# EAGLE board mux_geurts_3 (EAGLE 6.4)
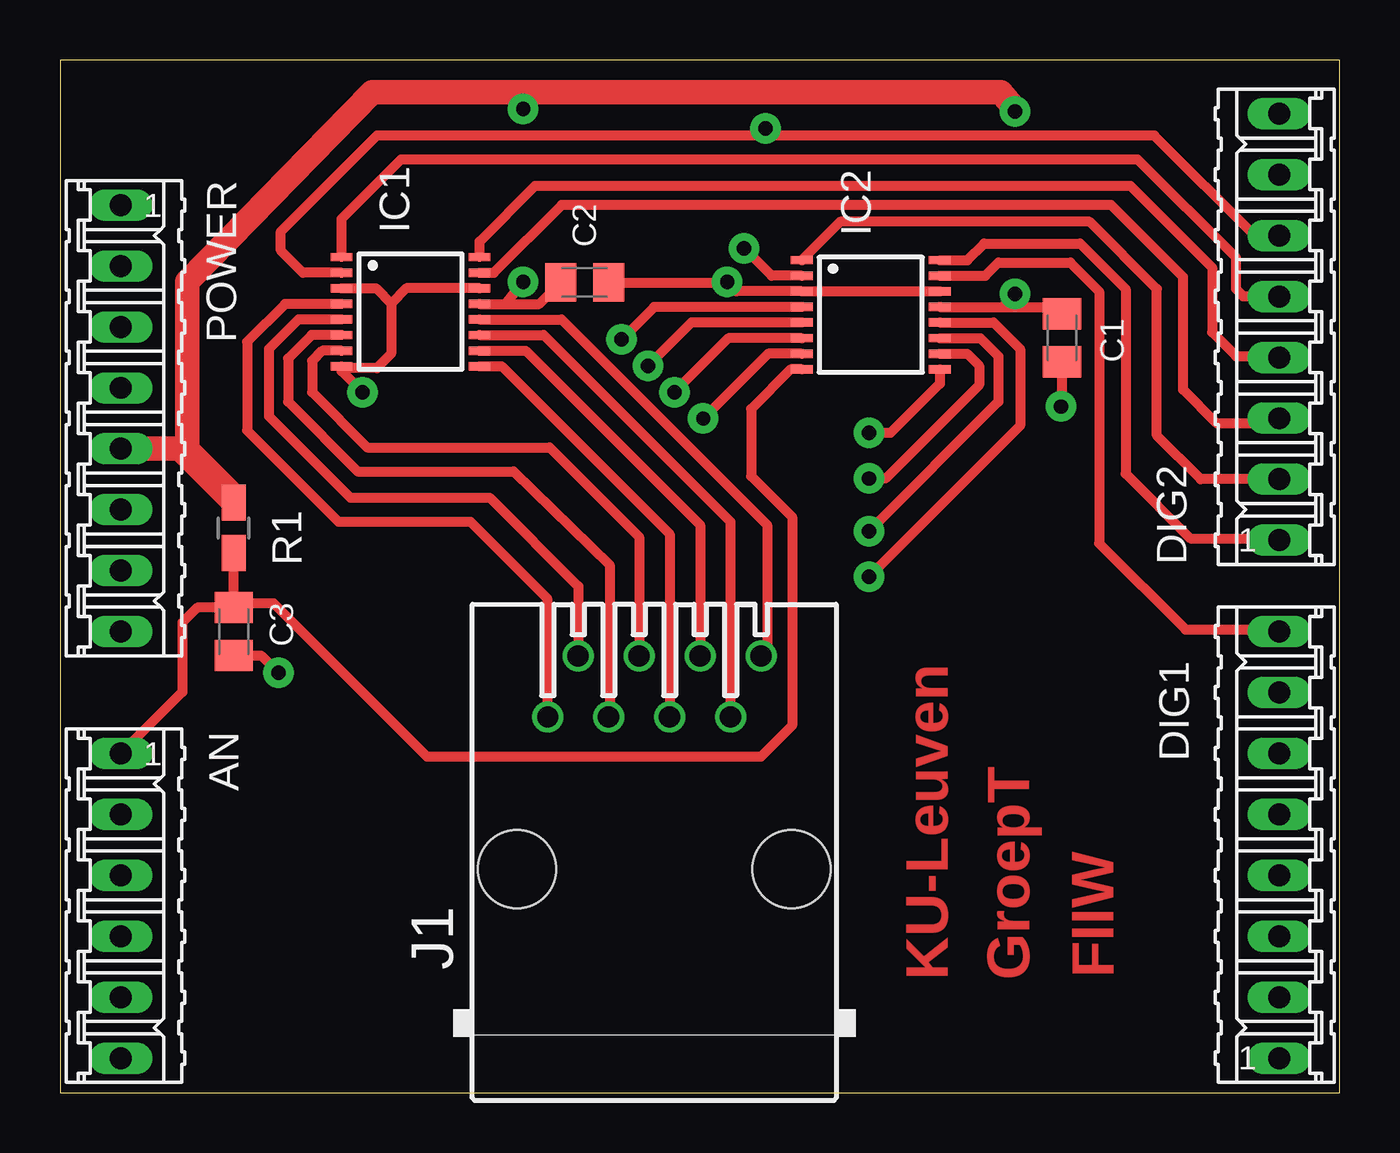
[diagram p0: board, top side]
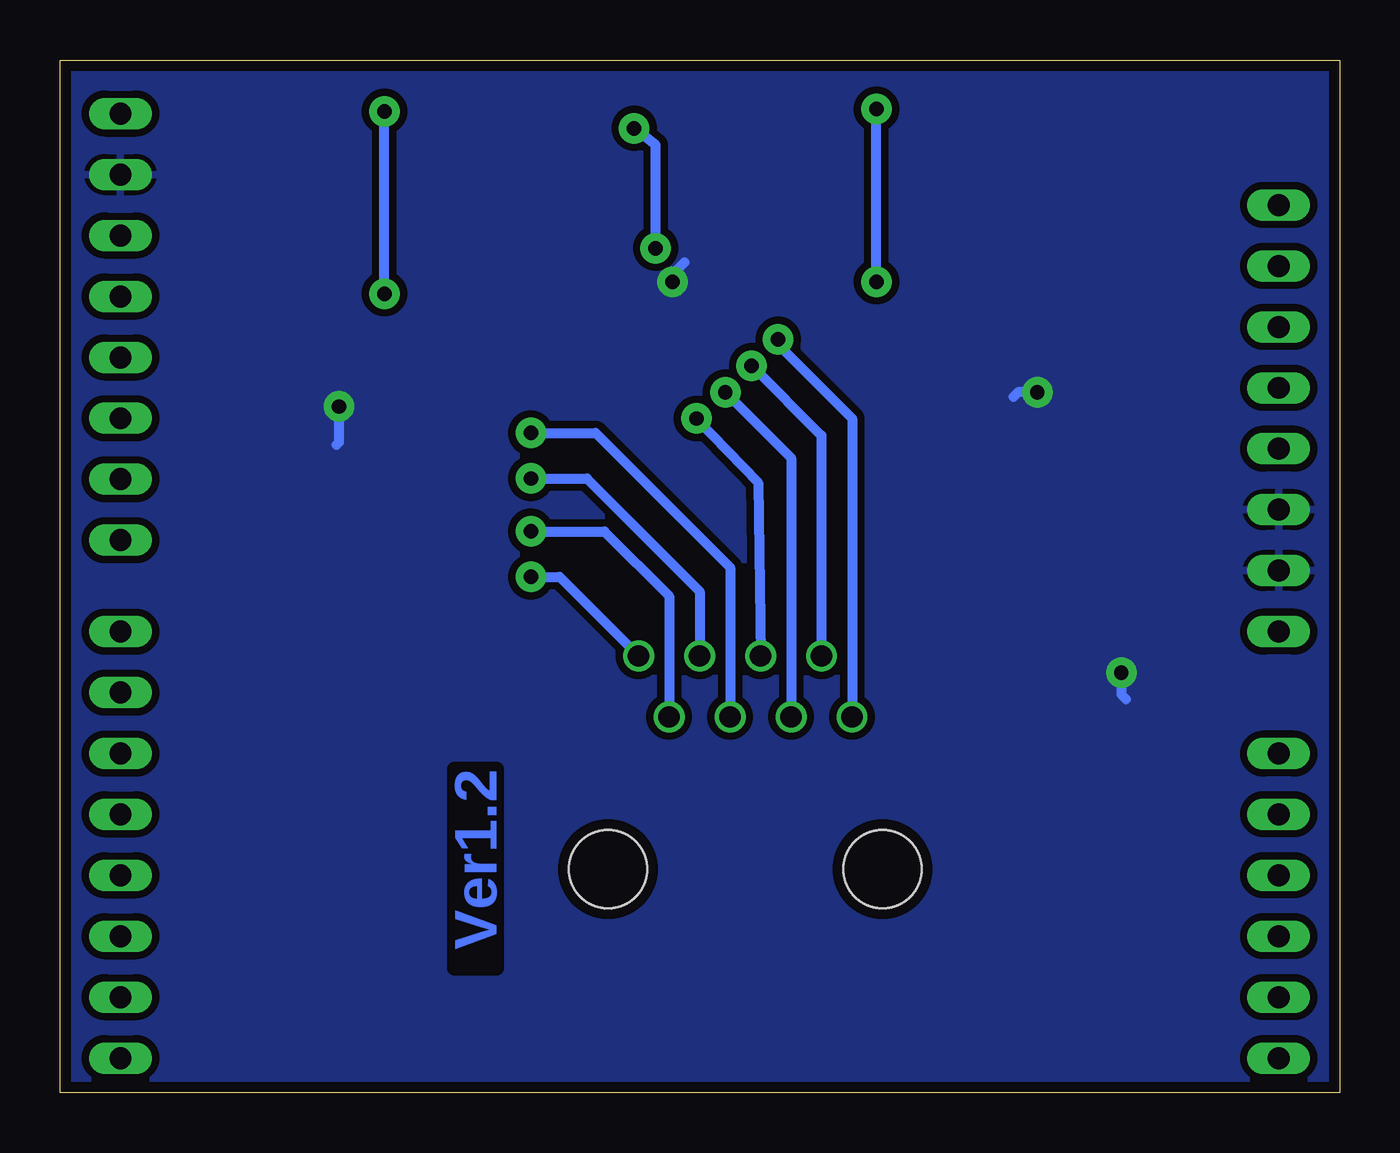
[diagram p1: board, bottom side, seen from below]

Size 53.32 x 43.05 mm. Coordinates in mm from the lower left corner, seen from the top.
Outline: 0,0 53.32,0 53.32,43.05 0,43.05 0,0
Copper layers (1*16): Top 0.018mm / dielectric 1.55mm / Bottom 0.018mm
Design rules "eC-PCB_proto-2-layer": minimum track width 0.15mm, minimum drill 0.25mm, track to track 0.15mm, track to pad 0.15mm, pad to pad 0.15mm, via to via 0.15mm, smd to smd 0.15mm, copper to edge 0.45mm, drill to drill 0.3mm, minimum pad ring 0.2mm, minimum via ring 0.2mm, stop-mask expansion 0.1mm, vias tented up to drill 0mil, thermal gap 0.2mm

## Footprints (pad centres in the part's own frame; a part is rotated, then mirrored left to right if it is on the bottom)
06P = drill 0.914 long: 1 -6.35,0; 2 -3.81,0; 3 -1.27,0; 4 1.27,0; 5 3.81,0; 6 6.35,0
C0805K = smd 1.3 x 1.6: 1 -1,0; 2 1,0
08P = drill 0.914 long: 1 -8.89,0; 2 -6.35,0; 3 -3.81,0; 4 -1.27,0; 5 1.27,0; 6 3.81,0; 7 6.35,0; 8 8.89,0
TSSOP16 = smd 0.9 x 0.35: 1 -2.875,2.275; 2 -2.875,1.625; 3 -2.875,0.975; 4 -2.875,0.325; 5 -2.875,-0.325; 6 -2.875,-0.975; 7 -2.875,-1.625; 8 -2.875,-2.275; 9 2.875,-2.275; 10 2.875,-1.625; 11 2.875,-0.975; 12 2.875,-0.325; 13 2.875,0.325; 14 2.875,0.975; 15 2.875,1.625; 16 2.875,2.275
520251-4 = drill 0.889: 1 -4.445,6.35; 2 -3.175,8.89; 3 -1.905,6.35; 4 -0.635,8.89; 5 0.635,6.35; 6 1.905,8.89; 7 3.175,6.35; 8 4.445,8.89 | hole 3.251: -5.715,0; 5.715,0
R0805W = smd 1.5 x 1: 1 -1.052,0; 2 1.052,0

## Placement (x,y rotation side)
AN  [06P]  2.54,7.79 270 top
C1  100n  [C0805K]  41.75,31.46 270 top
C2  100n  [C0805K]  21.86,33.77 0 top
C3  33p  [C0805K]  7.24,19.22 270 top
DIG1  [08P]  50.8,10.33 90 top
DIG2  [08P]  50.8,31.92 90 top
IC1  ADG608RU  [TSSOP16]  14.61,32.55 0 top
IC2  ADG608RU  [TSSOP16]  33.78,32.43 0 top
J1  [520251-4]  24.77,9.31 0 top
POWER  [08P]  2.54,28.11 270 top
R1  180  [R0805W]  7.24,23.54 270 top

## Library data of the parts
AN DIG1 DIG2 POWER = con-amp-quick; OC_FARNELL: unknown; OC_NEWARK: unknown
C1-C3 R1 = rcl
IC1 IC2 = analog-devices; MF: ALTERA CORPORATION; MPN: ADG608BRU; OC_FARNELL: 1465227; OC_NEWARK: 16F6552
J1 = con-amp

## Nets
+5V: C1.1 C2.1 IC1.13 IC2.13 POWER.5 R1.1
GND: C1.2 C2.2 C3.2 DIG2.7 IC1.3 IC1.8 IC1.14 IC2.3 IC2.14 POWER.6 POWER.7
N$1: DIG2.2 IC2.1
N$2: DIG2.1 IC2.16
N$3: DIG1.8 IC2.15
N$4: DIG2.5 IC1.1
N$5: DIG2.4 IC1.16
N$6: DIG2.3 IC1.15
N$17: AN.1 C3.1 IC2.8 R1.2
N$24: DIG2.6 IC1.2 IC2.2
S1: IC1.4 IC2.4 J1.1
S2: IC1.5 IC2.5 J1.2
S3: IC1.6 IC2.6 J1.3
S4: IC1.7 IC2.7 J1.4
S5: IC1.12 IC2.12 J1.8
S6: IC1.11 IC2.11 J1.7
S7: IC1.10 IC2.10 J1.6
S8: IC1.9 IC2.9 J1.5

## Tracks (layer width: path | path; a pad name or v marks a point on that pad's centre or on a via)
+5V  (via drill 0.6 pad 1.27)
  Top 0.406: C2.1 19.96,32.88 IC1.13 18.58,32.88 v19.3,33.8 | v19.3,41 19.5,41.7 | C1.1 41.46,32.75 IC2.13 39.25,32.75 v39.8,33.3 | v39.8,40.9 39.8,41 | 36.5,41.7 36.4,41.7
  Top 1.016: POWER.5 4.99,26.84 R1.1 7.24,24.86 5.3,26.8 5.3,33.8 13,41.7 19.5,41.7 36.4,41.7 | 39.8,41 39.2,41.7 36.5,41.7
  Bottom 0.406: v19.3,33.8 v19.3,41 | v39.8,33.3 v39.8,40.9
GND  (via drill 0.6 pad 1.27)
  Top 0.406: IC1.3 13.17,33.53 13.8,32.9 | 13.8,32.9 13.8,30.8 13.2,30.2 11.81,30.2 IC1.8 11.73,30.07 v12.6,29.2 | IC1.14 14.43,33.53 13.8,32.9 | IC2.14 IC2.3 28.2,33.4 v27.8,33.8 27.77,33.77 C2.2 | C1.2 41.75,28.65 v41.7,28.6 | C3.2 8.38,18.22 v9.1,17.5
  Bottom 0.406: v12.6,29.2 13.4,29.2 13.6,29 | v27.8,33.8 27.8,34.1 27.3,34.6 | v41.7,28.6 41.7,27.1 41.8,27 | v9.1,17.5 9.1,16.6 8.9,16.4
  pour Bottom (isolate 0.305): -1.27,43.35 -1.27,-2.37 54.61,-2.37 54.61,43.35
N$1
  Top 0.406: DIG2.2 47.53,25.57 45.7,27.4 45.7,33.5 42.9,36.3 32.5,36.3 IC2.1
N$2
  Top 0.406: IC2.16 37.8,34.7 38.5,35.4 42.5,35.4 44.4,33.5 44.4,25.8 47.1,23.1 50.73,23.1 DIG2.1
N$3
  Top 0.406: IC2.15 38.55,34.05 39.1,34.6 42.1,34.6 43.3,33.4 43.3,22.9 46.9,19.3 50.72,19.3 DIG1.8
N$4
  Top 0.406: IC1.1 11.73,36.43 14.2,38.9 44.9,38.9 49,34.8 49,33.5 49.3,33.2 DIG2.5
N$5
  Top 0.406: IC1.16 17.48,35.48 19.8,37.8 44.6,37.8 48,34.4 48,31.7 49,30.7 50.75,30.7 DIG2.4 50.75,30.6 50,30.6
N$6
  Top 0.406: IC1.15 18.08,34.18 20.9,37 43.8,37 46.8,34 46.8,29.3 48.2,27.9 50.59,27.9 DIG2.3
N$17
  Top 0.406: IC2.8 30.45,30.15 28.8,28.5 28.8,25.7 30.5,24 30.5,15.3 29.2,14 15.3,14 8.9,20.4 7.42,20.4 C3.1 | C3.1 R1.2 | C3.1 5.72,20.22 5.1,19.6 5.1,16.7 AN.1
N$24  (via drill 0.6 pad 1.27)
  Top 0.406: IC1.2 10.12,34.18 9.2,35.1 9.2,35.9 13.2,39.9 29.8,39.9 | DIG2.6 50.77,35.7 49.8,35.7 45.6,39.9 29.8,39.9 | IC2.2 29.65,34.05 v28.5,35.2 | v29.4,40.2 29.4,40.3 29.8,39.9
  Bottom 0.406: v28.5,35.2 28.5,39.5 v29.4,40.2
S1  (via drill 0.6 pad 1.27)
  Top 0.406: IC1.4 9.38,32.88 7.8,31.3 7.8,27.6 11.6,23.8 17.1,23.8 20.3,20.6 20.3,15.68 J1.1 | IC2.4 24.75,32.75 v23.4,31.4
  Bottom 0.406: J1.1 20.32,28.1 23.5,31.28 v23.4,31.4
S2  (via drill 0.6 pad 1.27)
  Top 0.406: IC1.5 9.93,32.23 8.7,31 8.7,28.2 12.1,24.8 17.9,24.8 21.6,21.1 21.6,18.21 J1.2 | IC2.5 26.3,32.1 v24.5,30.3
  Bottom 0.406: v24.5,30.3 21.6,27.4 21.6,18.7 21.59,18.69 J1.2
S3  (via drill 0.6 pad 1.27)
  Top 0.406: IC1.6 10.48,31.58 9.5,30.6 9.5,28.8 12.4,25.9 18.9,25.9 22.9,22 22.9,15.72 J1.3 | IC2.6 27.85,31.45 v25.6,29.2
  Bottom 0.406: v25.6,29.2 22.86,26.46 J1.3
S4  (via drill 0.6 pad 1.27)
  Top 0.406: IC1.7 10.93,30.93 10.5,30.5 10.5,29.2 12.8,26.9 20.4,26.9 24.13,23.17 J1.4 | IC2.7 29.5,30.8 v26.8,28.1
  Bottom 0.406: v26.8,28.1 24.23,25.43 J1.4
S5  (via drill 0.6 pad 1.27)
  Top 0.406: IC1.12 20.9,32.23 29.46,23.66 29.46,18.46 J1.8 | IC2.12 38.9,32.1 40,31 40,27.8 v33.7,21.5
  Bottom 0.406: v33.7,21.5 32.51,21.5 J1.8
S6  (via drill 0.6 pad 1.27)
  Top 0.406: J1.7 27.94,23.79 20.15,31.58 IC1.11 | IC2.11 38.35,31.45 39.1,30.7 39.1,28.8 v33.7,23.4
  Bottom 0.406: v33.7,23.4 30.64,23.4 27.94,20.7 J1.7
S7  (via drill 0.6 pad 1.27)
  Top 0.406: IC1.10 19.41,30.93 26.67,23.66 J1.6 | IC2.10 37.8,30.8 38.3,30.3 38.3,29.5 34.4,25.6 v33.7,25.6
  Bottom 0.406: v33.7,25.6 31.37,25.6 26.67,20.9 J1.6
S8  (via drill 0.6 pad 1.27)
  Top 0.406: IC1.9 18.4,30.28 25.4,23.28 J1.5 | IC2.9 36.66,29.56 34.6,27.5 v33.7,27.5
  Bottom 0.406: J1.5 25.4,21.9 31,27.5 v33.7,27.5

## Text on the board
Top: KU-Leuven | GroepT | FIIW
Bottom: Ver1.2